# Altium PCB iF11L.PcbDoc
Units mm, origin at the board's own origin, x right, y up, seen from the top; angles counter-clockwise.
Board outline 113.5 x 113.5 mm, 2 copper layers (Top Layer, Bottom Layer), stack 0.981 mm thick; 38 components, 21 nets, 78 pads, 24 vias.
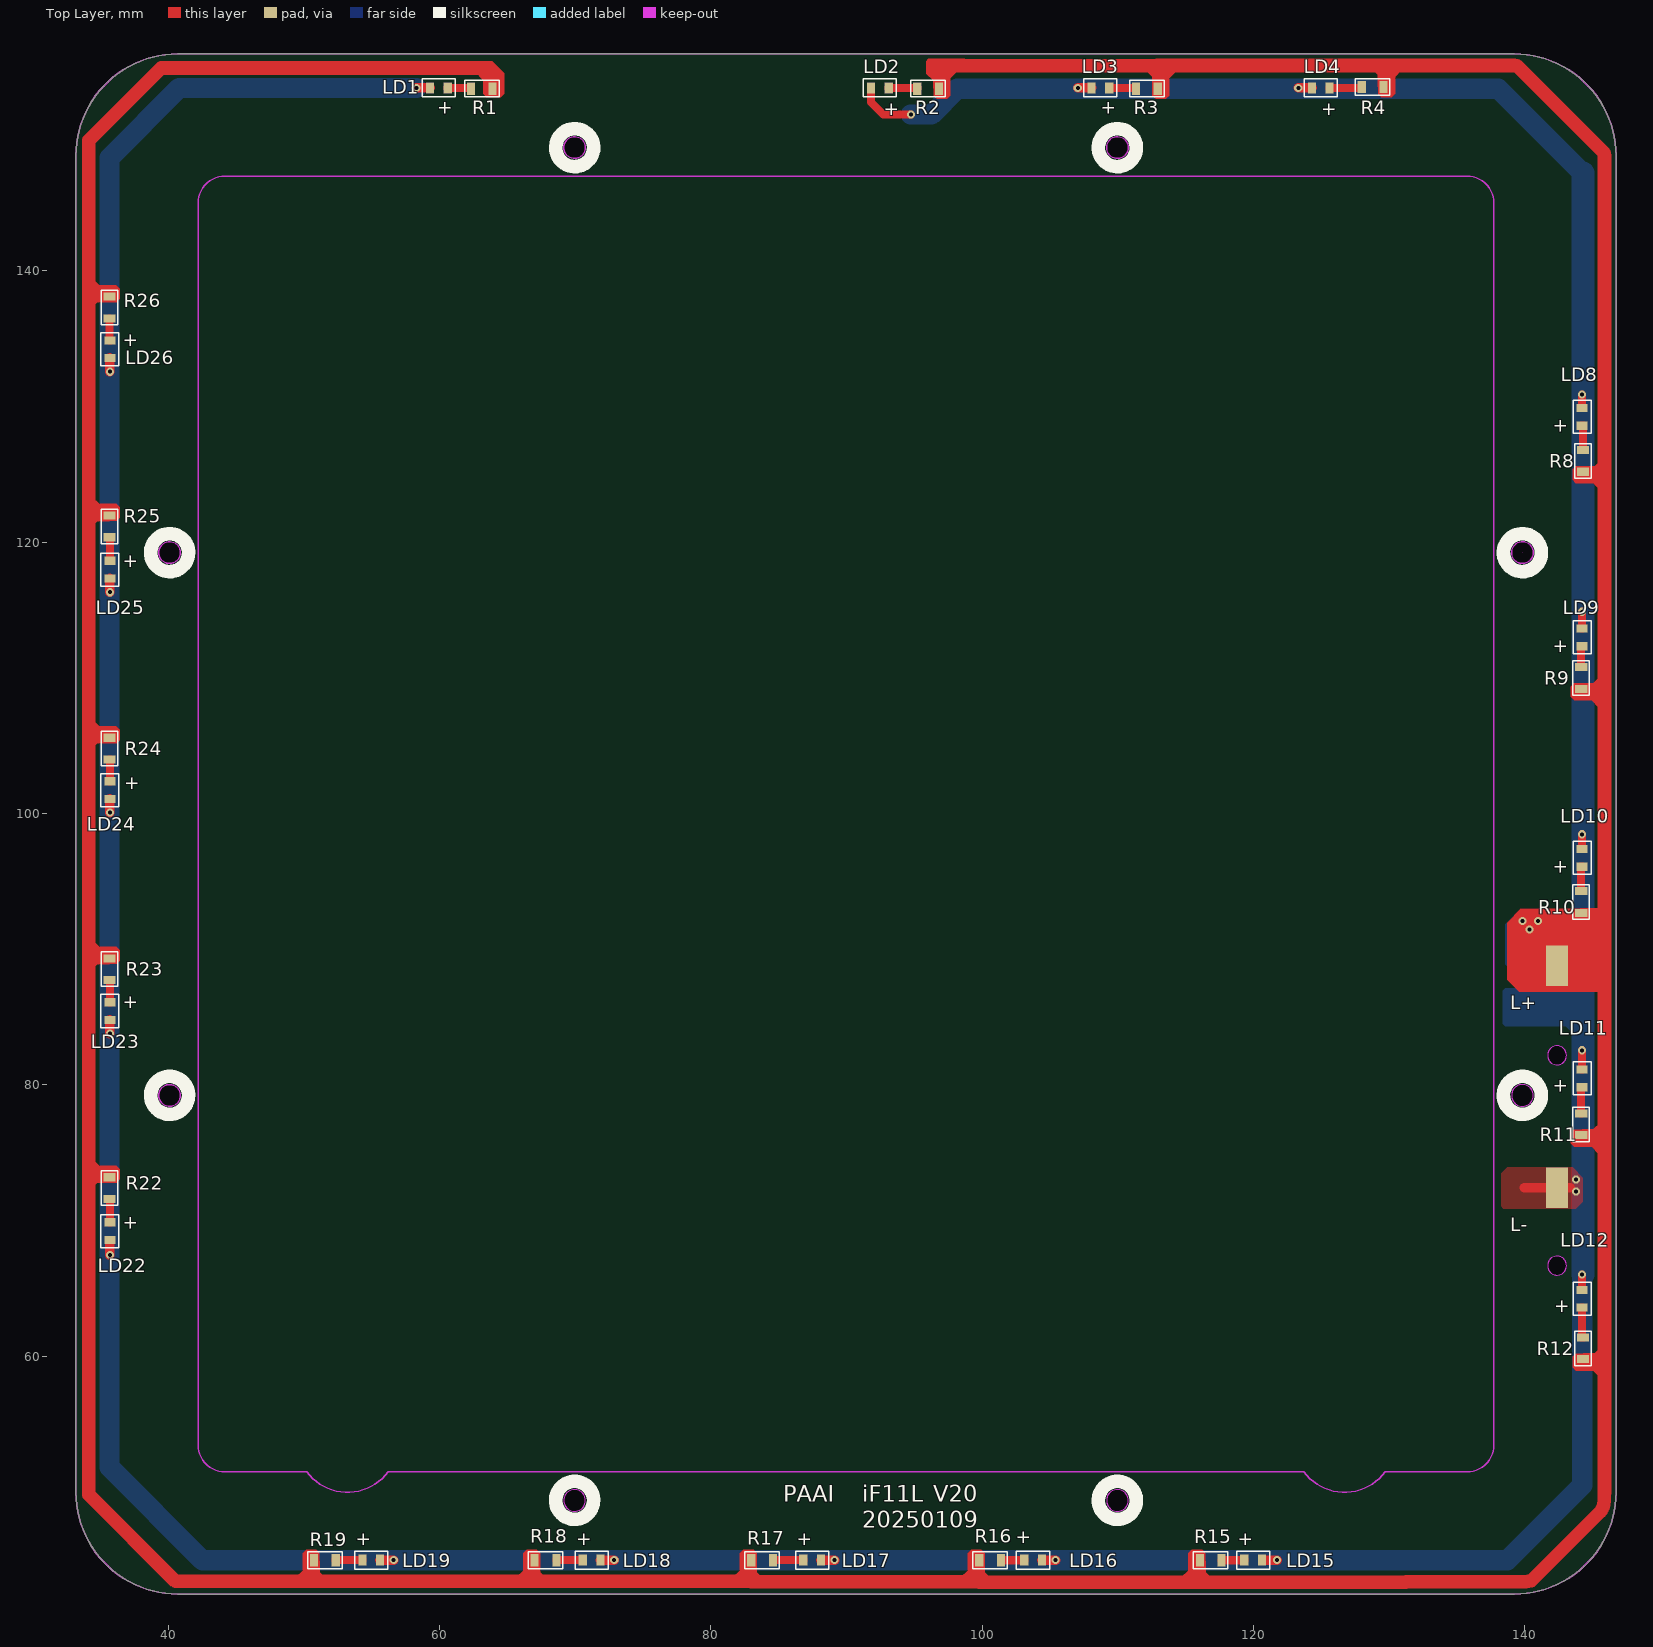
[diagram p0: Top Layer view]
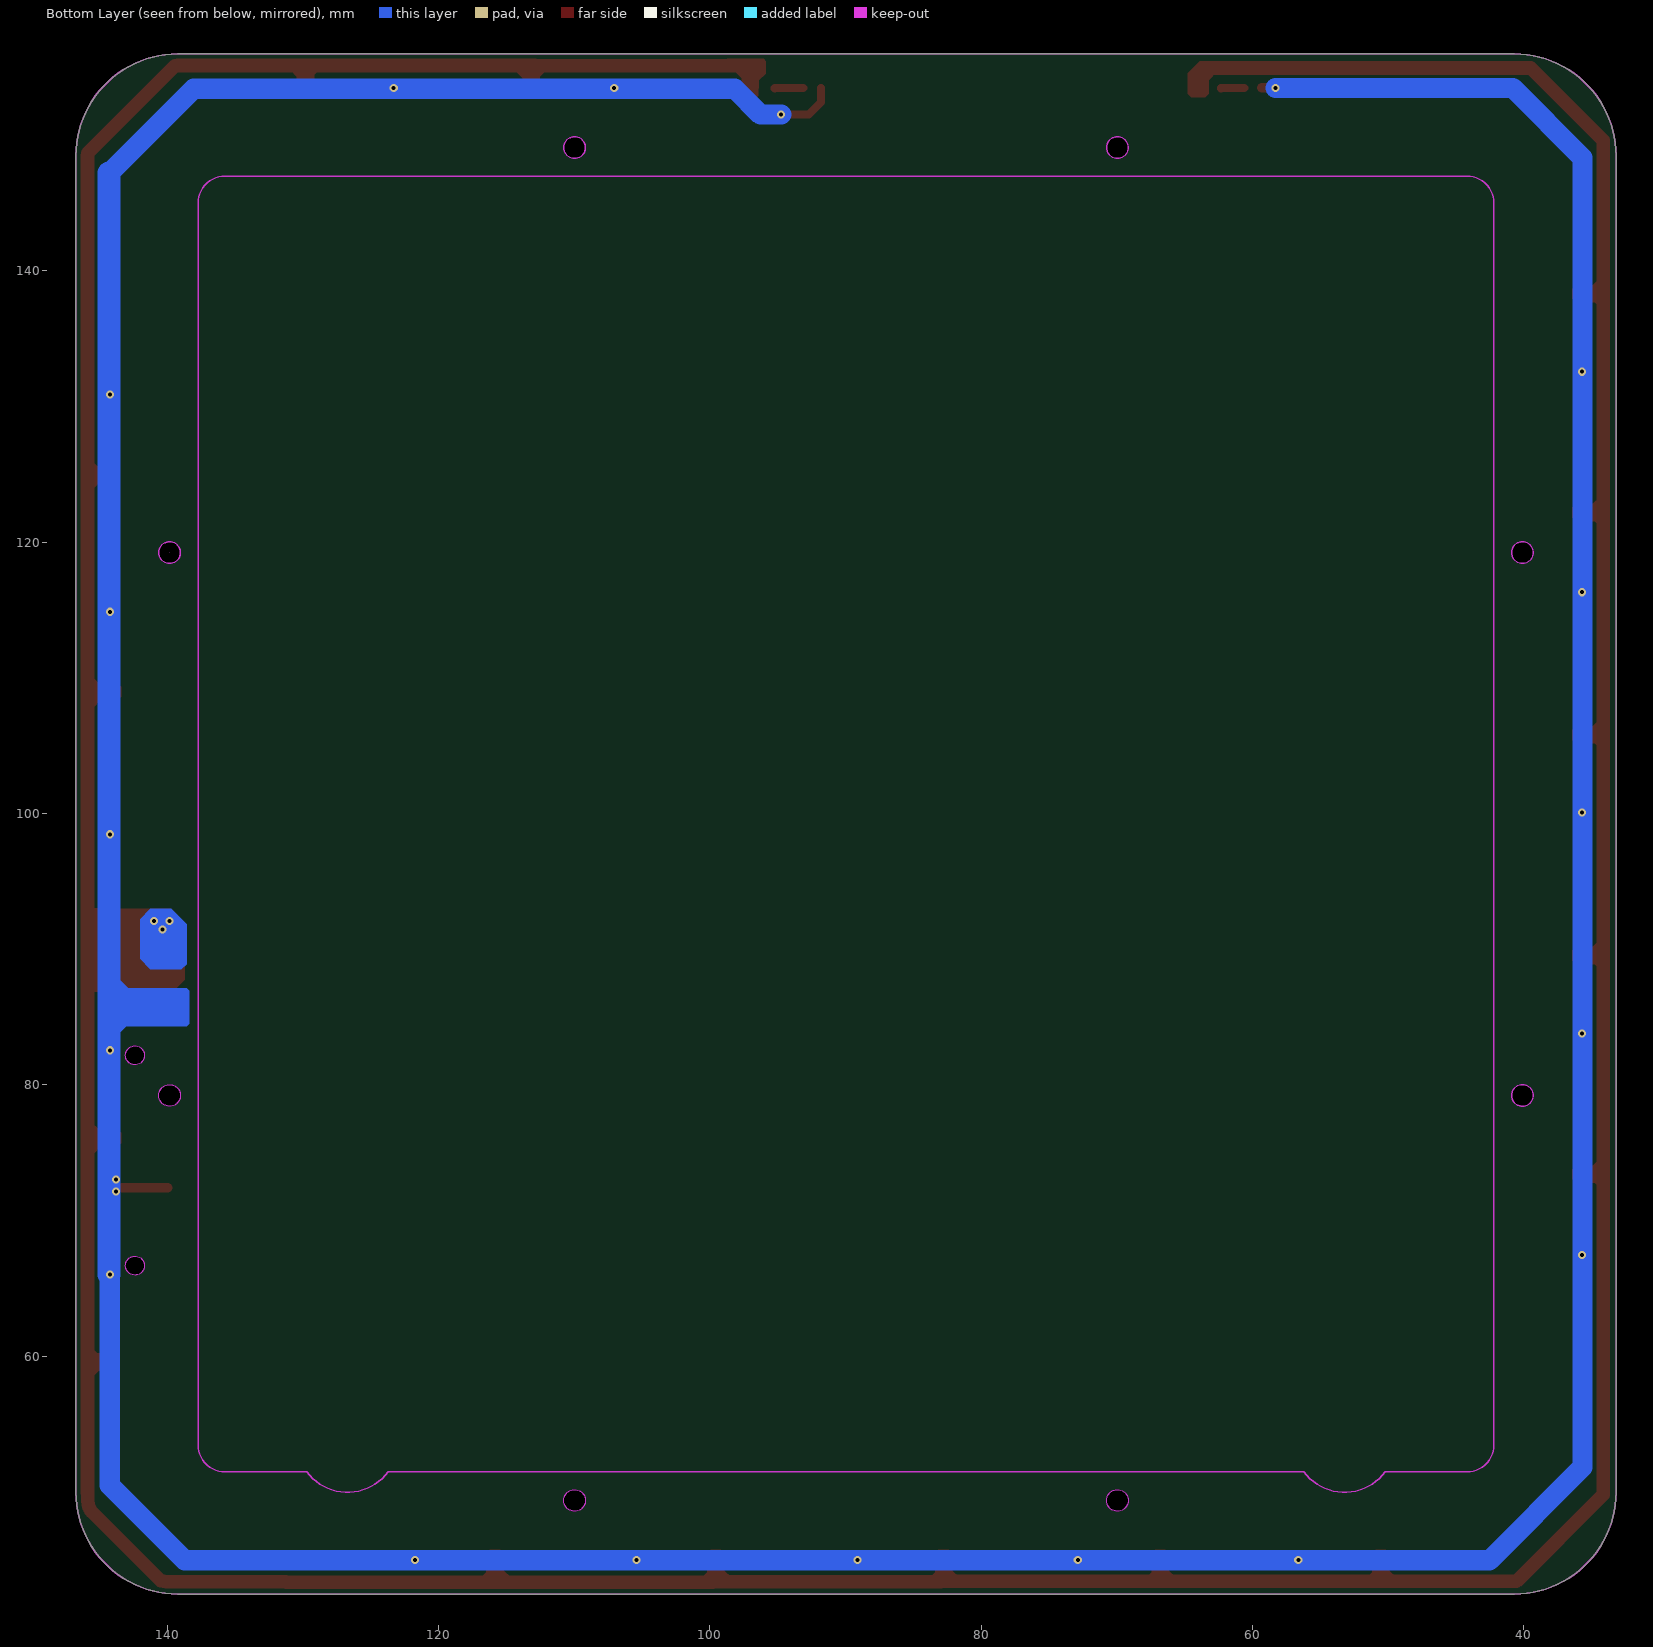
[diagram p1: Bottom Layer view, seen from below]
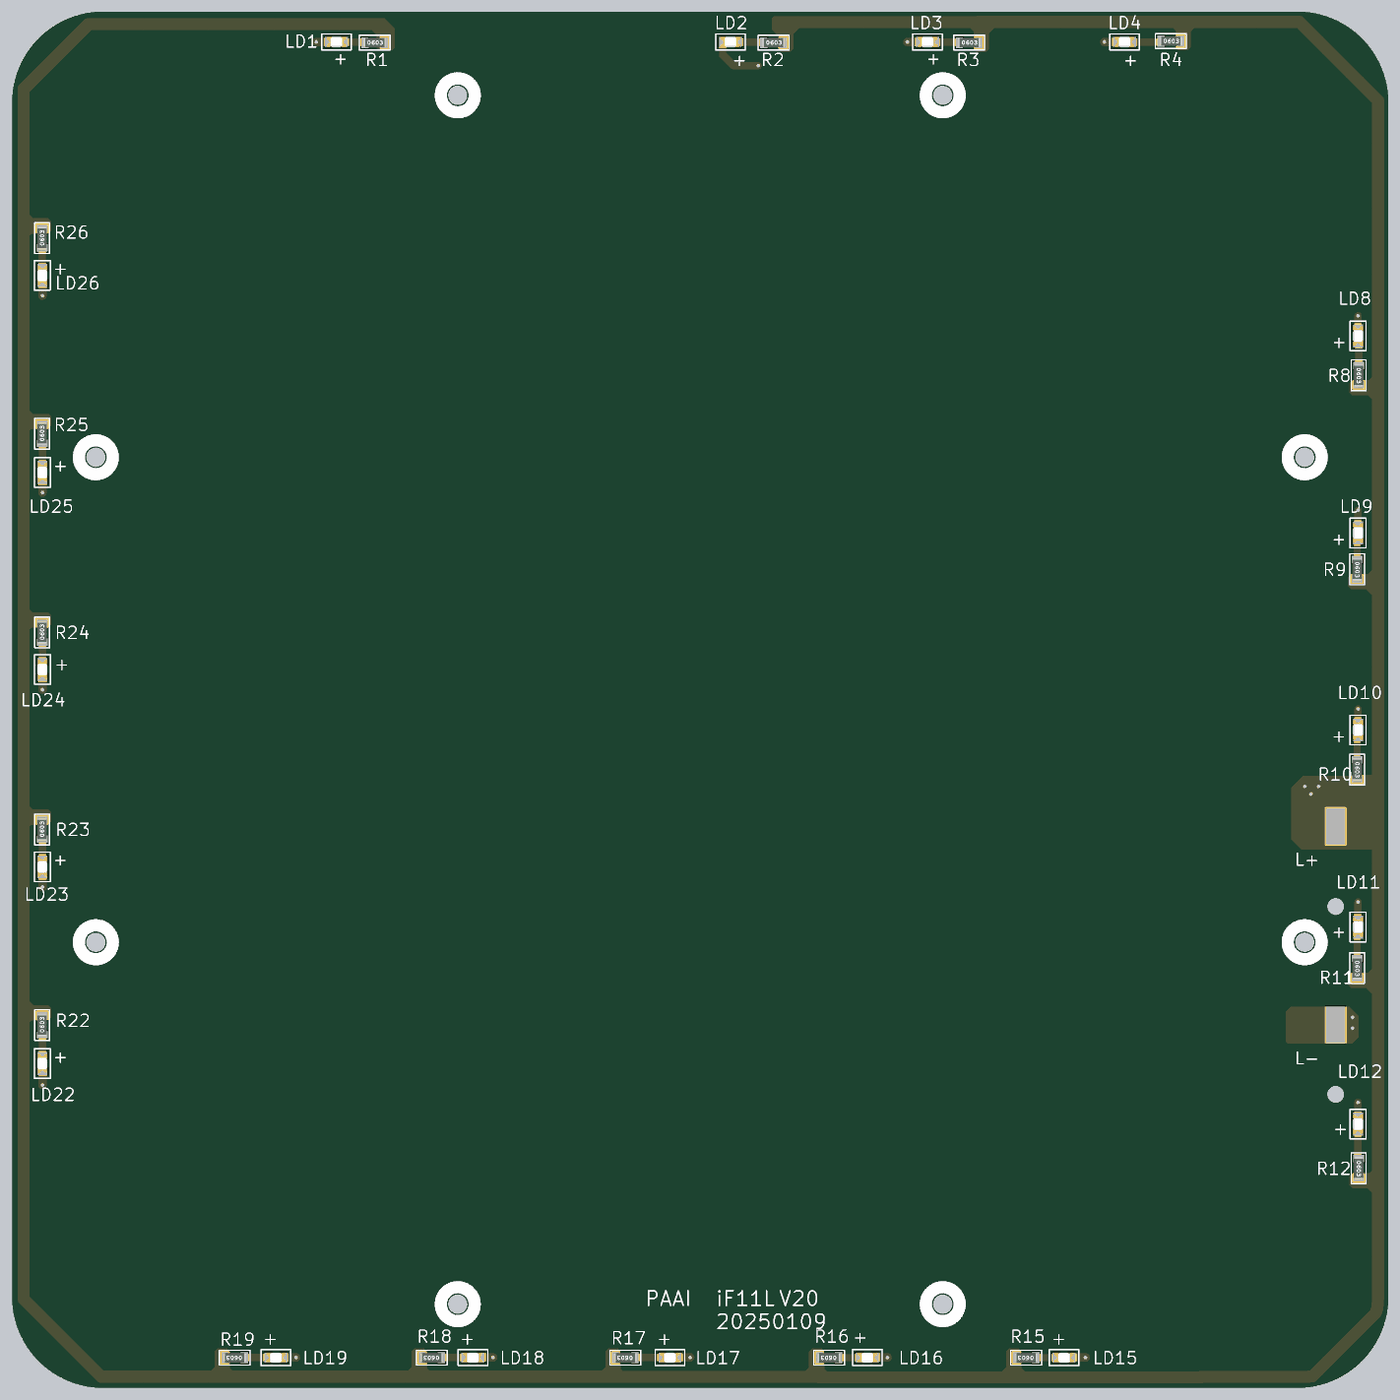
[diagram p2: 3D render of the assembled board from above, using the file's embedded part models]

## Layer stack, top to bottom
Top Solder: solder mask 0.0102, Solder Resist, Dk 3.5
Top Layer: signal copper 0.0356
Dielectric 1: dielectric 0.91, FR-4, Dk 4.8
Bottom Layer: signal copper 0.0356
Bottom Solder: solder mask 0.0102, Solder Resist, Dk 3.5

## Board outline
33.213,49.971 ccw(c40.713,49.971) 40.713,42.471 139.213,42.471 ccw(c139.213,49.971) 146.713,49.971 146.713,148.471 ccw(c139.213,148.471) 139.213,155.971 40.713,155.971 ccw(c40.713,148.471) 33.213,148.471
cut-out: 141.667,66.675 ccw(c142.367,66.675) 142.367,65.975 ccw(c142.367,66.675) 143.067,66.675 ccw(c142.367,66.675) 142.367,67.375 ccw(c142.367,66.675)
cut-out: 141.667,82.169 ccw(c142.367,82.169) 142.367,81.469 ccw(c142.367,82.169) 143.067,82.169 ccw(c142.367,82.169) 142.367,82.869 ccw(c142.367,82.169)
cut-out: 40.113,118.421 cw(c40.113,119.221) 39.313,119.221 cw(c40.113,119.221) 40.113,120.021 cw(c40.113,119.221) 40.913,119.221 cw(c40.113,119.221)
cut-out: 39.841,118.465 cw(c39.841,118.469) 39.838,118.469 cw(c39.841,118.469) 39.841,118.472 cw(c39.841,118.469) 39.844,118.469 cw(c39.841,118.469)
cut-out: 39.841,118.465 cw(c39.841,118.469) 39.838,118.469 cw(c39.841,118.469) 39.841,118.472 cw(c39.841,118.469) 39.844,118.469 cw(c39.841,118.469)
cut-out: 39.841,118.465 cw(c39.841,118.469) 39.838,118.469 cw(c39.841,118.469) 39.841,118.472 cw(c39.841,118.469) 39.844,118.469 cw(c39.841,118.469)
cut-out: 39.313,79.218 cw(c40.113,79.218) 40.113,80.018 cw(c40.113,79.218) 40.913,79.218 cw(c40.113,79.218) 40.113,78.418 cw(c40.113,79.218)
cut-out: 69.163,49.371 ccw(c69.963,49.371) 69.963,48.571 ccw(c69.963,49.371) 70.763,49.371 ccw(c69.963,49.371) 69.963,50.171 ccw(c69.963,49.371)
cut-out: 109.163,49.371 ccw(c109.963,49.371) 109.963,48.571 ccw(c109.963,49.371) 110.763,49.371 ccw(c109.963,49.371) 109.963,50.171 ccw(c109.963,49.371)
cut-out: 139.013,79.221 ccw(c139.813,79.221) 139.813,78.421 ccw(c139.813,79.221) 140.613,79.221 ccw(c139.813,79.221) 139.813,80.021 ccw(c139.813,79.221)
cut-out: 139.538,78.469 ccw(c139.541,78.469) 139.541,78.465 ccw(c139.541,78.469) 139.544,78.469 ccw(c139.541,78.469) 139.541,78.472 ccw(c139.541,78.469)
cut-out: 139.013,119.221 cw(c139.813,119.221) 139.813,120.021 cw(c139.813,119.221) 140.613,119.221 cw(c139.813,119.221) 139.813,118.421 cw(c139.813,119.221)
cut-out: 109.963,148.271 cw(c109.963,149.071) 109.163,149.071 cw(c109.963,149.071) 109.963,149.871 cw(c109.963,149.071) 110.763,149.071 cw(c109.963,149.071)
cut-out: 69.96,148.271 cw(c69.96,149.071) 69.16,149.071 cw(c69.96,149.071) 69.96,149.871 cw(c69.96,149.071) 70.76,149.071 cw(c69.96,149.071)

## Design rules (kind name [scope] priority, off if disabled: settings)
Clearance [All] p1: gap=0.3 ignorepadtopadclearanceinfootprint=FALSE
MinimumSolderMaskSliver [All] p1: minsoldermaskwidth=0.099
PolygonConnect [All] p1: connectstyle=Direct reliefconductorwidth=0.254 reliefentries=4 polygonreliefangle="90 Angle" airgapwidth=0.254
RoutingVias [All] p1: holewidth=0.3 width=0.6 viastyle="Through Hole" minholewidth=0.3 minwidth=0.6 maxholewidth=0.3 maxwidth=0.6
SilkToSilkClearance [All] p1: silktosilkclearance=0.099
SilkToSolderMaskClearance [IsPad] p1: minsilkscreentomaskgap=0.099 clearancetoexposedcopper=TRUE
SolderMaskExpansion [All] p1: expansion=0.102 istentingtop=FALSE
SupplyNets "Schematic Supply Nets_1" [InNet('VCC')] p1: voltage=0.000
SupplyNets "Schematic Supply Nets" [InNet('GND')] p2: voltage=0.000
Width [All] p1: maxlimit=5 minlimit=0.254 preferedwidth=0.3
27 further rules are at their usual default settings.

## Components (designator, comment, footprint, x,y, rotation, side; value= is the part's Value field where it differs from the comment)
LD1 "HQ19-2101UWCE2 0603" LED-0603-WS 59.96,153.471 r180 top
LD2 "HQ19-2101UWCE2 0603" LED-0603-WS 92.46,153.471 r180 top
LD3 "HQ19-2101UWCE2 0603" LED-0603-WS 108.71,153.471 r180 top
LD4 "HQ19-2101UWCE2 0603" LED-0603-WS 124.96,153.471 r180 top
LD8 "HQ19-2101UWCE2 0603" LED-0603-WS 144.213,129.224 r90 top
LD9 "HQ19-2101UWCE2 0603" LED-0603-WS 144.213,112.974 r90 top
LD10 "HQ19-2101UWCE2 0603" LED-0603-WS 144.213,96.724 r90 top
LD11 "HQ19-2101UWCE2 0603" LED-0603-WS 144.213,80.474 r90 top
LD12 "HQ19-2101UWCE2 0603" LED-0603-WS 144.213,64.224 r90 top
LD15 "HQ19-2101UWCE2 0603" LED-0603-WS 119.966,44.971 r0 top
LD16 "HQ19-2101UWCE2 0603" LED-0603-WS 103.746,44.974 r0 top
LD17 "HQ19-2101UWCE2 0603" LED-0603-WS 87.466,44.971 r0 top
LD18 "HQ19-2101UWCE2 0603" LED-0603-WS 71.216,44.971 r0 top
LD19 "HQ19-2101UWCE2 0603" LED-0603-WS 54.966,44.971 r0 top
LD22 "HQ19-2101UWCE2 0603" LED-0603-WS 35.713,69.218 r270 top
LD23 "HQ19-2101UWCE2 0603" LED-0603-WS 35.713,85.437 r270 top
LD24 "HQ19-2101UWCE2 0603" LED-0603-WS 35.713,101.718 r270 top
LD25 "HQ19-2101UWCE2 0603" LED-0603-WS 35.713,117.968 r270 top
LD26 "HQ19-2101UWCE2 0603" LED-0603-WS 35.713,134.218 r270 top
R1 "27R" R0603-LD 63.119,153.416 r0 top
R2 "27R" R0603-LD 96.012,153.416 r0 top
R3 "27R" R0603-LD 112.141,153.416 r0 top
R4 "27R" R0603-LD 128.778,153.543 r0 top
R8 "27R" R0603-LD 144.272,125.984 r270 top
R9 "27R" R0603-LD 144.145,109.982 r270 top
R10 "27R" R0603-LD 144.145,93.472 r270 top
R11 "27R" R0603-LD 144.145,77.089 r270 top
R12 "27R" R0603-LD 144.272,60.579 r270 top
R15 "27R" R0603-LD 116.84,44.958 r180 top
R16 "27R" R0603-LD 100.584,44.958 r180 top
R17 "27R" R0603-LD 83.782,44.958 r180 top
R18 "27R" R0603-LD 67.818,44.958 r180 top
R19 "27R" R0603-LD 51.562,44.958 r180 top
R22 "27R" R0603-LD 35.687,72.39 r90 top
R23 "27R" R0603-LD 35.687,88.519 r90 top
R24 "27R" R0603-LD 35.687,104.775 r90 top
R25 "27R" R0603-LD 35.687,121.158 r90 top
R26 "27R" R0603-LD 35.687,137.287 r90 top

## Footprints (in the part's own frame and the unit in brackets; to place one, negate y for a bottom-side part, rotate by r counter-clockwise, add the part's x,y. Pads: shape width x height; smd on the part's side, far side on the other; paste and mask are expansions set on the pad)
LED-0603-WS [mm]
  rect 0.6x0.8 smd: 1(-0.65,0) 2(0.65,0)
  silkscreen extent -1.22,-0.66 1.22,0.66, body extent -0.8,-0.4 0.8,0.4, height 0.6
R0603-LD [mm]
  rect 0.6x0.9 smd: 1(-0.8,0) 2(0.8,0)
  Top Layer pour cut-out: -0.4,0.566 0.406,0.566 0.406,-0.561 -0.4,-0.561
  silkscreen extent -1.27,-0.61 1.27,0.61, body extent -1,-0.39 1,0.39, height 0.8

## Part data
LD1 LD2 LD3 LD4 LD8 LD9 LD10 LD11 LD12 LD15 LD16 LD17 LD18 LD19 LD22 LD23 LD24 LD25 LD26: library part "LED WS", Supplier=广州市亿毫安电子有限公司
R1 R2 R3 R4 R8 R9 R10 R11 R12 R15 R16 R17 R18 R19 R22 R23 R24 R25 R26: library part "R 0603 27R", "5%", Manufacturer=LAGEO, Part No=W-T-RE-RS03K270JT, Material Name="贴片电阻0603 27Ω 5%", Product Code=WP0002702, Supplier=南京南山半导体有限公司

## Free pads (board coordinates)
  rect 1.6x3 smd: 2(142.367,88.773) 3(142.367,72.422)

## Via types
v1: diameter 0.6, hole 0.3, Top Layer to Bottom Layer, tented both sides, 24 vias

## Nets (pads, with @x,y where several pads share a name; then routed paths per layer and width w, separated by ;. In a path a pad name is that pad's centre, name@x,y a point inside that pad or via, vN(x,y) a via of type N, cw(c..) or ccw(c..) an arc to the next point about the centre after c; other vN are vias at no path point)
GND: LD1.2 LD2.2 LD3.2 LD4.2 LD8.2 LD9.2 LD10.2 LD11.2 LD12.2 LD15.2 LD16.2 LD17.2 LD18.2 LD19.2 LD22.2 LD23.2 LD24.2 LD25.2 LD26.2 pad.3 | length 411.4
  Top Layer w0.6: LD2.2 91.81,152.411 92.71,151.511 v1(94.742,151.511) ; LD3.2@108.06,153.416 LD3.2 ; LD4.2@124.31,153.416 LD4.2 ; LD12.2 v1(144.212,66.012) ; LD11.2 v1(144.212,82.541) ; LD10.2 v1(144.213,98.462) ; LD9.2 144.213,114.857 v1(144.217,114.861) ; LD8.2 v1(144.213,130.885)
  Top Layer w0.7: v1(35.713,67.443) LD22.2@35.713,68.456 ; v1(35.713,83.775) LD23.2 ; v1(35.713,100.056) LD24.2 ; v1(35.713,116.306) LD25.2 ; v1(35.713,132.556) LD26.2 ; LD19.2 v1(56.628,44.971) ; v1(58.297,153.471) LD1.2 ; LD18.2 v1(72.878,44.971) ; LD17.2 v1(89.128,44.971) ; LD16.2 v1(105.408,44.974) ; v1(107.048,153.471) LD3.2 ; LD15.2@120.728,44.971 v1(121.74,44.971) v1@121.746,44.965 ; v1(123.298,153.471) LD4.2 ; 139.954,72.422 143.351,72.422
  Bottom Layer w1.5: v1@58.307,153.47 40.821,153.47 35.687,148.336 35.687,51.816 42.532,44.971 v1(121.74,44.971) 138.697,44.971 144.212,50.486 v1(144.212,66.012) ; v1(94.742,151.511) 96.266,151.511 98.171,153.416 138.049,153.416 144.272,147.193
  Bottom Layer w1.7: v1@144.272,66.012 144.272,147.193
  other v1: 143.764,72.136 143.764,73.025
NetLD1_1: LD1.1 R1.1 | length 1.8
  Top Layer w0.6: LD1.1 62.319,153.471 R1.1
NetLD2_1: LD2.1 R2.1 | length 2.2
  Top Layer w0.6: LD2.1 95.212,153.471 R2.1
NetLD3_1: LD3.1 R3.1 | length 2
  Top Layer w0.6: LD3.1 111.341,153.471 R3.1
NetLD4_1: LD4.1 R4.1 | length 2.4
  Top Layer w0.6: LD4.1 127.978,153.471 R4.1
NetLD8_1: LD8.1 R8.1 | length 1.8
  Top Layer w0.6: LD8.1 144.272,128.574 R8.1
NetLD9_1: LD9.1 R9.1 | length 1.6
  Top Layer w0.6: R9.1 144.145,112.324 LD9.1
NetLD10_1: LD10.1 R10.1 | length 1.9
  Top Layer w0.6: R10.1 144.145,96.074 LD10.1
NetLD11_1: LD11.1 R11.1 | length 2
  Top Layer w0.6: R11.1 144.145,79.824 LD11.1
NetLD12_1: LD12.1 R12.1 | length 2.3
  Top Layer w0.6: LD12.1 144.213,61.379 R12.1
NetLD15_1: LD15.1 R15.1 | length 1.7
  Top Layer w0.6: R15.1 119.316,44.958 LD15.1
NetLD16_1: LD16.1 R16.1 | length 1.8
  Top Layer w0.6: R16.1@101.384,45.009 R16.1 103.096,44.958 LD16.1
NetLD17_1: LD17.1 R17.1 | length 2.2
  Top Layer w0.6: R17.1 84.582,44.971 LD17.1
NetLD18_1: LD18.1 R18.1 | length 2
  Top Layer w0.6: R18.1 68.618,44.971 LD18.1
NetLD19_1: LD19.1 R19.1 | length 2
  Top Layer w0.6: R19.1 52.362,44.971 LD19.1
NetLD22_1: LD22.1 R22.1 | length 1.7
  Top Layer w0.6: R22.1 35.713,71.59 LD22.1
NetLD23_1: LD23.1 R23.1 | length 1.7
  Top Layer w0.6: R23.1 35.713,87.719 LD23.1
NetLD24_1: LD24.1 R24.1 | length 1.6
  Top Layer w0.6: R24.1 35.713,103.975 LD24.1
NetLD25_1: LD25.1 R25.1 | length 1.8
  Top Layer w0.6: R25.1 35.713,120.358 LD25.1
NetLD26_1: LD26.1 R26.1 | length 1.6
  Top Layer w0.6: R26.1 35.687,134.868 LD26.1
VCC: pad.2 R1.2 R2.2 R3.2 R4.2 R8.2 R9.2 R10.2 R11.2 R12.2 R15.2 R16.2 R17.2 R18.2 R19.2 R22.2 R23.2 R24.2 R25.2 R26.2 | length 440
  Top Layer w0.7: 34.163,73.156 34.197,73.19 R22.2 ; 34.163,89.408 34.252,89.319 R23.2 ; 34.163,102.997 34.189,102.971 ; 34.163,105.664 34.252,105.575 R24.2 ; 34.163,118.11 34.294,117.979 ; 34.163,122.047 34.252,121.958 R25.2 ; 34.163,133.096 34.273,132.986 ; 34.163,138.176 34.252,138.087 R26.2 ; 50.546,43.307 50.762,43.523 R19.2 ; 66.929,43.307 67.018,43.396 R18.2 ; 82.982,43.383 82.982,43.396 R17.2 ; R2.2 96.812,155.105 ; R16.2 99.784,43.345 99.787,43.342 99.822,43.307 ; R3.2 112.941,155.121 ; R15.2 116.04,43.345 116.078,43.307 ; R4.2 129.578,155.121 ; 131.191,43.307 131.28,43.396 ; v1@140.843,92.202 140.208,91.567 140.208,90.011 142.367,90.424 ; v1(140.97,92.075) 141.478,91.567 143.04,91.567 144.045,92.572 144.045,92.622 144.095,92.622 R10.2 145.811,92.672 145.9,92.583 145.863,92.583 ; R11.2 145.885,76.289 145.923,76.327 145.863,76.327 ; R9.2 145.885,109.182 145.923,109.22 145.863,109.22 ; R12.2 145.885,59.779 145.923,59.817 145.863,59.817 ; R8.2 145.834,125.184 145.863,125.155 ; 145.885,65.494 145.923,65.532
  Top Layer w1: R1.2 63.919,154.354 63.333,154.94 39.497,154.94 34.163,149.606 34.163,138.176 34.163,133.096 34.163,122.047 34.163,118.11 34.163,105.664 34.163,102.997 34.163,89.408 34.163,73.156 34.163,49.784 40.551,43.396 67.018,43.396 82.982,43.396 ; 82.982,43.383 99.746,43.383 99.784,43.345 ; 96.812,155.105 112.887,155.105 112.903,155.121 ; 99.787,43.342 131.226,43.342 ; 112.941,155.121 129.578,155.121 138.978,155.121 139.211,155.121 139.394,155.119 145.861,148.652 145.863,148.471 145.863,125.184 145.863,109.182 145.863,92.672 145.863,76.289 145.863,65.494 145.863,59.779 145.863,49.971 cw(c139.213,49.971) 145.8,49.057 cw(c144.81,49.196) 145.517,48.489 140.469,43.441 cw(c139.213,49.971) 140.041,43.373 131.257,43.373
  other v1: 140.335,91.44 139.827,92.075

## Polygon pours and split planes (outlines as drawn)
GND on Top Layer "NONET_L-01_P-001" (solid, pour order 0): 143.51,73.914 144.272,73.152 144.272,71.374 143.764,70.866 138.409,70.866 138.242,71.032 138.242,73.472 138.684,73.914

## Keep-outs
Keep-Out Layer:
  circle w0.013: c142.367,66.675 r0.7
  circle w0.013: c142.367,82.169 r0.7
  circle w0.013: c109.966,49.371 r0.8
  circle w0.013: c139.813,119.224 r0.8
  circle w0.013: c40.113,79.218 r0.8
  circle w0.013: c69.96,149.071 r0.8
  circle w0.013: c69.963,49.371 r0.8
  circle w0.013: c109.963,49.371 r0.8
  circle w0.006: c69.211,49.643 r0.003
  circle w0.006: c70.715,49.099 r0.003
  circle w0.013: c139.813,79.221 r0.8
  circle w0.013: c139.813,119.221 r0.8
  circle w0.006: c139.813,119.221 r0.003
  circle w0.006: c139.541,78.469 r0.003
  circle w0.006: c140.085,79.973 r0.003
  circle w0.013: c109.963,149.071 r0.8
  circle w0.013: c69.963,149.071 r0.8
  circle w0.006: c110.715,148.799 r0.003
  circle w0.006: c109.211,149.343 r0.003
  circle w0.013: c40.113,119.221 r0.8
  circle w0.013: c40.113,79.221 r0.8
  circle w0.006: c40.385,119.973 r0.003
  circle w0.006: c39.841,118.469 r0.003
  lines w0.1: 33.213,49.971 ccw(c40.713,49.971) 40.713,42.471 139.213,42.471 ccw(c139.213,49.971) 146.713,49.971 146.713,148.471 ccw(c139.213,148.471) 139.213,155.971 40.713,155.971 ccw(c40.713,148.471) 33.213,148.471 33.213,49.971 ; 42.213,53.471 ccw(c44.214,53.472) 44.213,51.471 50.213,51.471 ccw(c53.213,53.721) 56.213,51.471 123.713,51.471 ccw(c126.713,53.721) 129.713,51.471 135.713,51.471 ccw(c135.712,53.472) 137.713,53.471 137.713,144.971 ccw(c135.712,144.97) 135.713,146.971 44.213,146.971 ccw(c44.214,144.97) 42.213,144.971 42.213,53.471

## Other copper
Top Layer:
  region net VCC: 62.731,155.435 63.894,155.435 64.77,154.559 64.77,153.035 64.516,152.781 63.5,152.781 63.246,153.035 63.246,154.051 62.611,154.686
  region net VCC: 98.708,155.602 96.039,155.602 95.885,155.448 95.885,154.515 96.418,153.982 96.461,154.026 96.812,154.026
  region net VCC: 95.885,154.813 96.393,154.305 96.393,153.443 96.418,153.419 96.418,152.883 96.647,152.654 97.409,152.654 97.663,152.908 97.663,154.178 98.171,154.686
  region net VCC: 112.014,154.813 112.522,154.305 112.522,153.443 112.547,153.419 112.547,152.883 112.776,152.654 113.538,152.654 113.792,152.908 113.792,154.178 114.3,154.686
  region net VCC: 128.651,154.94 129.159,154.432 129.159,153.57 129.184,153.546 129.184,153.01 129.413,152.781 130.175,152.781 130.429,153.035 130.429,154.305 130.937,154.813
  region net VCC: 145.669,126.111 145.161,125.603 144.299,125.603 144.275,125.578 143.739,125.578 143.51,125.349 143.51,124.587 143.764,124.333 145.034,124.333 145.542,123.825
  region net VCC: 145.542,110.109 145.034,109.601 144.172,109.601 144.148,109.576 143.612,109.576 143.383,109.347 143.383,108.585 143.637,108.331 144.907,108.331 145.415,107.823
  region net VCC: 145.542,77.216 145.034,76.708 144.172,76.708 144.148,76.683 143.612,76.683 143.383,76.454 143.383,75.692 143.637,75.438 144.907,75.438 145.415,74.93
  region net VCC: 145.669,60.706 145.161,60.198 144.299,60.198 144.275,60.173 143.739,60.173 143.51,59.944 143.51,59.182 143.764,58.928 145.034,58.928 145.542,58.42
  region net VCC: 116.967,43.561 116.459,44.069 116.459,44.931 116.434,44.955 116.434,45.491 116.205,45.72 115.443,45.72 115.189,45.466 115.189,44.196 114.681,43.688
  region net VCC: 100.711,43.561 100.203,44.069 100.203,44.931 100.178,44.955 100.178,45.491 99.949,45.72 99.187,45.72 98.933,45.466 98.933,44.196 98.425,43.688
  region net VCC: 83.909,43.561 83.401,44.069 83.401,44.931 83.376,44.955 83.376,45.491 83.147,45.72 82.385,45.72 82.131,45.466 82.131,44.196 81.623,43.688
  region net VCC: 67.945,43.561 67.437,44.069 67.437,44.931 67.412,44.955 67.412,45.491 67.183,45.72 66.421,45.72 66.167,45.466 66.167,44.196 65.659,43.688
  region net VCC: 51.689,43.561 51.181,44.069 51.181,44.931 51.156,44.955 51.156,45.491 50.927,45.72 50.165,45.72 49.911,45.466 49.911,44.196 49.403,43.688
  region net VCC: 34.29,72.263 34.798,72.771 35.66,72.771 35.684,72.796 36.22,72.796 36.449,73.025 36.449,73.787 36.195,74.041 34.925,74.041 34.417,74.549
  region net VCC: 34.29,88.392 34.798,88.9 35.66,88.9 35.684,88.925 36.22,88.925 36.449,89.154 36.449,89.916 36.195,90.17 34.925,90.17 34.417,90.678
  region net VCC: 34.29,104.648 34.798,105.156 35.66,105.156 35.684,105.181 36.22,105.181 36.449,105.41 36.449,106.172 36.195,106.426 34.925,106.426 34.417,106.934
  region net VCC: 34.29,121.031 34.798,121.539 35.66,121.539 35.684,121.564 36.22,121.564 36.449,121.793 36.449,122.555 36.195,122.809 34.925,122.809 34.417,123.317
  region net VCC: 34.29,137.16 34.798,137.668 35.66,137.668 35.684,137.693 36.22,137.693 36.449,137.922 36.449,138.684 36.195,138.938 34.925,138.938 34.417,139.446
  region net VCC: 145.669,93.853 145.669,92.964 139.7,92.964 138.684,91.948 138.684,87.757 139.573,86.868 145.669,86.868 145.835,87.034
Bottom Layer:
  region net VCC: 139.7,92.964 138.557,91.821 138.557,88.9 138.938,88.519 141.224,88.519 141.986,89.281 141.986,92.202 141.224,92.964
  region net GND: 144.272,89.662 144.272,88.519 142.875,87.122 138.557,87.122 138.369,86.934 138.369,84.494 138.536,84.328 143.002,84.328 143.912,83.418

## Silkscreen, mask and mechanical layers (free items; w line width, h text height)
Top Overlay:
  lines w1: 41.512,119.286 ccw(c40.113,119.221) 41.513,119.221 ; 41.515,79.286 ccw(c40.116,79.221) 41.516,79.221 ; 71.362,49.436 ccw(c69.963,49.371) 71.363,49.371 ; 71.365,149.136 ccw(c69.966,149.071) 71.366,149.071 ; 111.362,49.436 ccw(c109.963,49.371) 111.363,49.371 ; 111.362,149.136 ccw(c109.963,149.071) 111.363,149.071 ; 141.212,79.286 ccw(c139.813,79.221) 141.213,79.221 ; 141.215,119.286 ccw(c139.816,119.221) 141.216,119.221
  text "L+" at 138.911,85.571 h1
  text "L-" at 138.911,69.188 h1
  text "PAAI" at 85.337,49.269 h1.2
  text "iF11L" at 91.179,49.269 h1.2
  text "V20" at 96.386,49.269 h1.2
  text "20250109" at 91.179,47.364 h1.2
Mechanical 2:
  circle w0.006: c39.839,118.467 r0.003
  circle w0.006: c40.382,119.972 r0.003
  circle w0.013: c40.111,79.22 r0.8
  circle w0.013: c40.111,119.22 r0.8
  circle w0.006: c109.208,149.342 r0.003
  circle w0.006: c110.713,148.798 r0.003
  circle w0.013: c69.961,149.07 r0.8
  circle w0.013: c109.961,149.07 r0.8
  circle w0.006: c140.082,79.972 r0.003
  circle w0.006: c139.539,78.467 r0.003
  circle w0.013: c139.811,119.22 r0.8
  circle w0.013: c139.811,79.22 r0.8
  circle w0.006: c70.713,49.098 r0.003
  circle w0.006: c69.208,49.642 r0.003
  circle w0.013: c109.961,49.37 r0.8
  circle w0.013: c69.961,49.37 r0.8
  circle w0.013: c69.957,149.07 r0.8
  circle w0.013: c40.111,79.217 r0.8
  circle w0.013: c139.811,119.223 r0.8
  circle w0.013: c109.964,49.37 r0.8
  circle w0.013: c142.365,82.168 r0.7
  circle w0.013: c142.365,66.674 r0.7
  lines w0.1: 33.211,49.97 ccw(c40.711,49.97) 40.711,42.47 139.211,42.47 ccw(c139.211,49.97) 146.711,49.97 146.711,148.47 ccw(c139.211,148.47) 139.211,155.97 40.711,155.97 ccw(c40.711,148.47) 33.211,148.47 33.211,49.97 ; 42.211,53.47 ccw(c44.211,53.47) 44.211,51.47 50.211,51.47 ccw(c53.211,53.72) 56.211,51.47 123.711,51.47 ccw(c126.711,53.72) 129.711,51.47 135.711,51.47 ccw(c135.71,53.47) 137.711,53.47 137.711,144.97 ccw(c135.71,144.969) 135.711,146.97 44.211,146.97 ccw(c44.211,144.969) 42.211,144.97 42.211,53.47
Mechanical 3:
  circle w0.006: c74.963,153.471 r0.003
  circle w0.006: c74.963,153.471 r0.003
  circle w0.006: c134.963,153.471 r0.003
  circle w0.006: c134.963,153.471 r0.003

## Text inside footprints (layer, text, board x,y; h text height)
LD1: Mechanical 29 "-" at 58.336,153.798 h0.7 r180; Mechanical 29 "+" at 62.019,153.752 h0.7 r180; Top Overlay "+" at 60.987,152.427 h1 r180
LD2: Mechanical 29 "-" at 90.836,153.798 h0.7 r180; Mechanical 29 "+" at 94.519,153.752 h0.7 r180; Top Overlay "+" at 93.88,152.3 h1 r180
LD3: Mechanical 29 "+" at 110.769,153.752 h0.7 r180; Mechanical 29 "-" at 107.086,153.798 h0.7 r180; Top Overlay "+" at 109.882,152.427 h1 r180
LD4: Mechanical 29 "-" at 123.336,153.798 h0.7 r180; Mechanical 29 "+" at 127.019,153.752 h0.7 r180; Top Overlay "+" at 126.138,152.3 h1 r180
LD8: Mechanical 29 "+" at 144.494,127.165 h0.7 r90; Mechanical 29 "-" at 144.54,130.848 h0.7 r90; Top Overlay "+" at 143.029,127.989 h1 r90
LD9: Mechanical 29 "+" at 144.494,110.915 h0.7 r90; Mechanical 29 "-" at 144.54,114.598 h0.7 r90; Top Overlay "+" at 143.029,111.733 h1 r90
LD10: Mechanical 29 "+" at 144.494,94.665 h0.7 r90; Mechanical 29 "-" at 144.54,98.348 h0.7 r90; Top Overlay "+" at 143.029,95.477 h1 r90
LD11: Mechanical 29 "+" at 144.494,78.415 h0.7 r90; Mechanical 29 "-" at 144.54,82.098 h0.7 r90; Top Overlay "+" at 143.029,79.348 h1 r90
LD12: Mechanical 29 "+" at 144.494,62.165 h0.7 r90; Mechanical 29 "-" at 144.54,65.848 h0.7 r90; Top Overlay "+" at 143.156,63.092 h1 r90
LD15: Mechanical 29 "+" at 117.907,44.69 h0.7; Mechanical 29 "-" at 121.59,44.644 h0.7; Top Overlay "+" at 118.845,46.074 h1
LD16: Mechanical 29 "+" at 101.687,44.693 h0.7; Mechanical 29 "-" at 105.37,44.647 h0.7; Top Overlay "+" at 102.462,46.201 h1
LD17: Mechanical 29 "+" at 85.407,44.69 h0.7; Mechanical 29 "-" at 89.09,44.644 h0.7; Top Overlay "+" at 86.333,46.074 h1
LD18: Mechanical 29 "+" at 69.157,44.69 h0.7; Mechanical 29 "-" at 72.84,44.644 h0.7; Top Overlay "+" at 70.077,46.074 h1
LD19: Mechanical 29 "+" at 52.907,44.69 h0.7; Mechanical 29 "-" at 56.59,44.644 h0.7; Top Overlay "+" at 53.821,46.074 h1
LD22: Mechanical 29 "+" at 35.432,71.277 h0.7 r270; Mechanical 29 "-" at 35.386,67.594 h0.7 r270; Top Overlay "+" at 36.803,70.385 h1 r270
LD23: Mechanical 29 "+" at 35.432,87.496 h0.7 r270; Mechanical 29 "-" at 35.386,83.813 h0.7 r270; Top Overlay "+" at 36.803,86.641 h1 r270
LD24: Mechanical 29 "+" at 35.432,103.777 h0.7 r270; Mechanical 29 "-" at 35.386,100.094 h0.7 r270; Top Overlay "+" at 36.93,102.77 h1 r270
LD25: Mechanical 29 "-" at 35.386,116.344 h0.7 r270; Mechanical 29 "+" at 35.432,120.027 h0.7 r270; Top Overlay "+" at 36.803,119.153 h1 r270
LD26: Mechanical 29 "+" at 35.432,136.277 h0.7 r270; Mechanical 29 "-" at 35.386,132.594 h0.7 r270; Top Overlay "+" at 36.803,135.409 h1 r270